# Altium PCB controller.PcbDoc
Units mil, origin at the board's own origin, x right, y up, seen from the top; angles counter-clockwise.
Board outline 2362.2 x 2362.2 mil, 2 copper layers (Top Layer, Bottom Layer), stack 61.756 mil thick; 2 components, 4 nets, 21 pads, 0 vias.
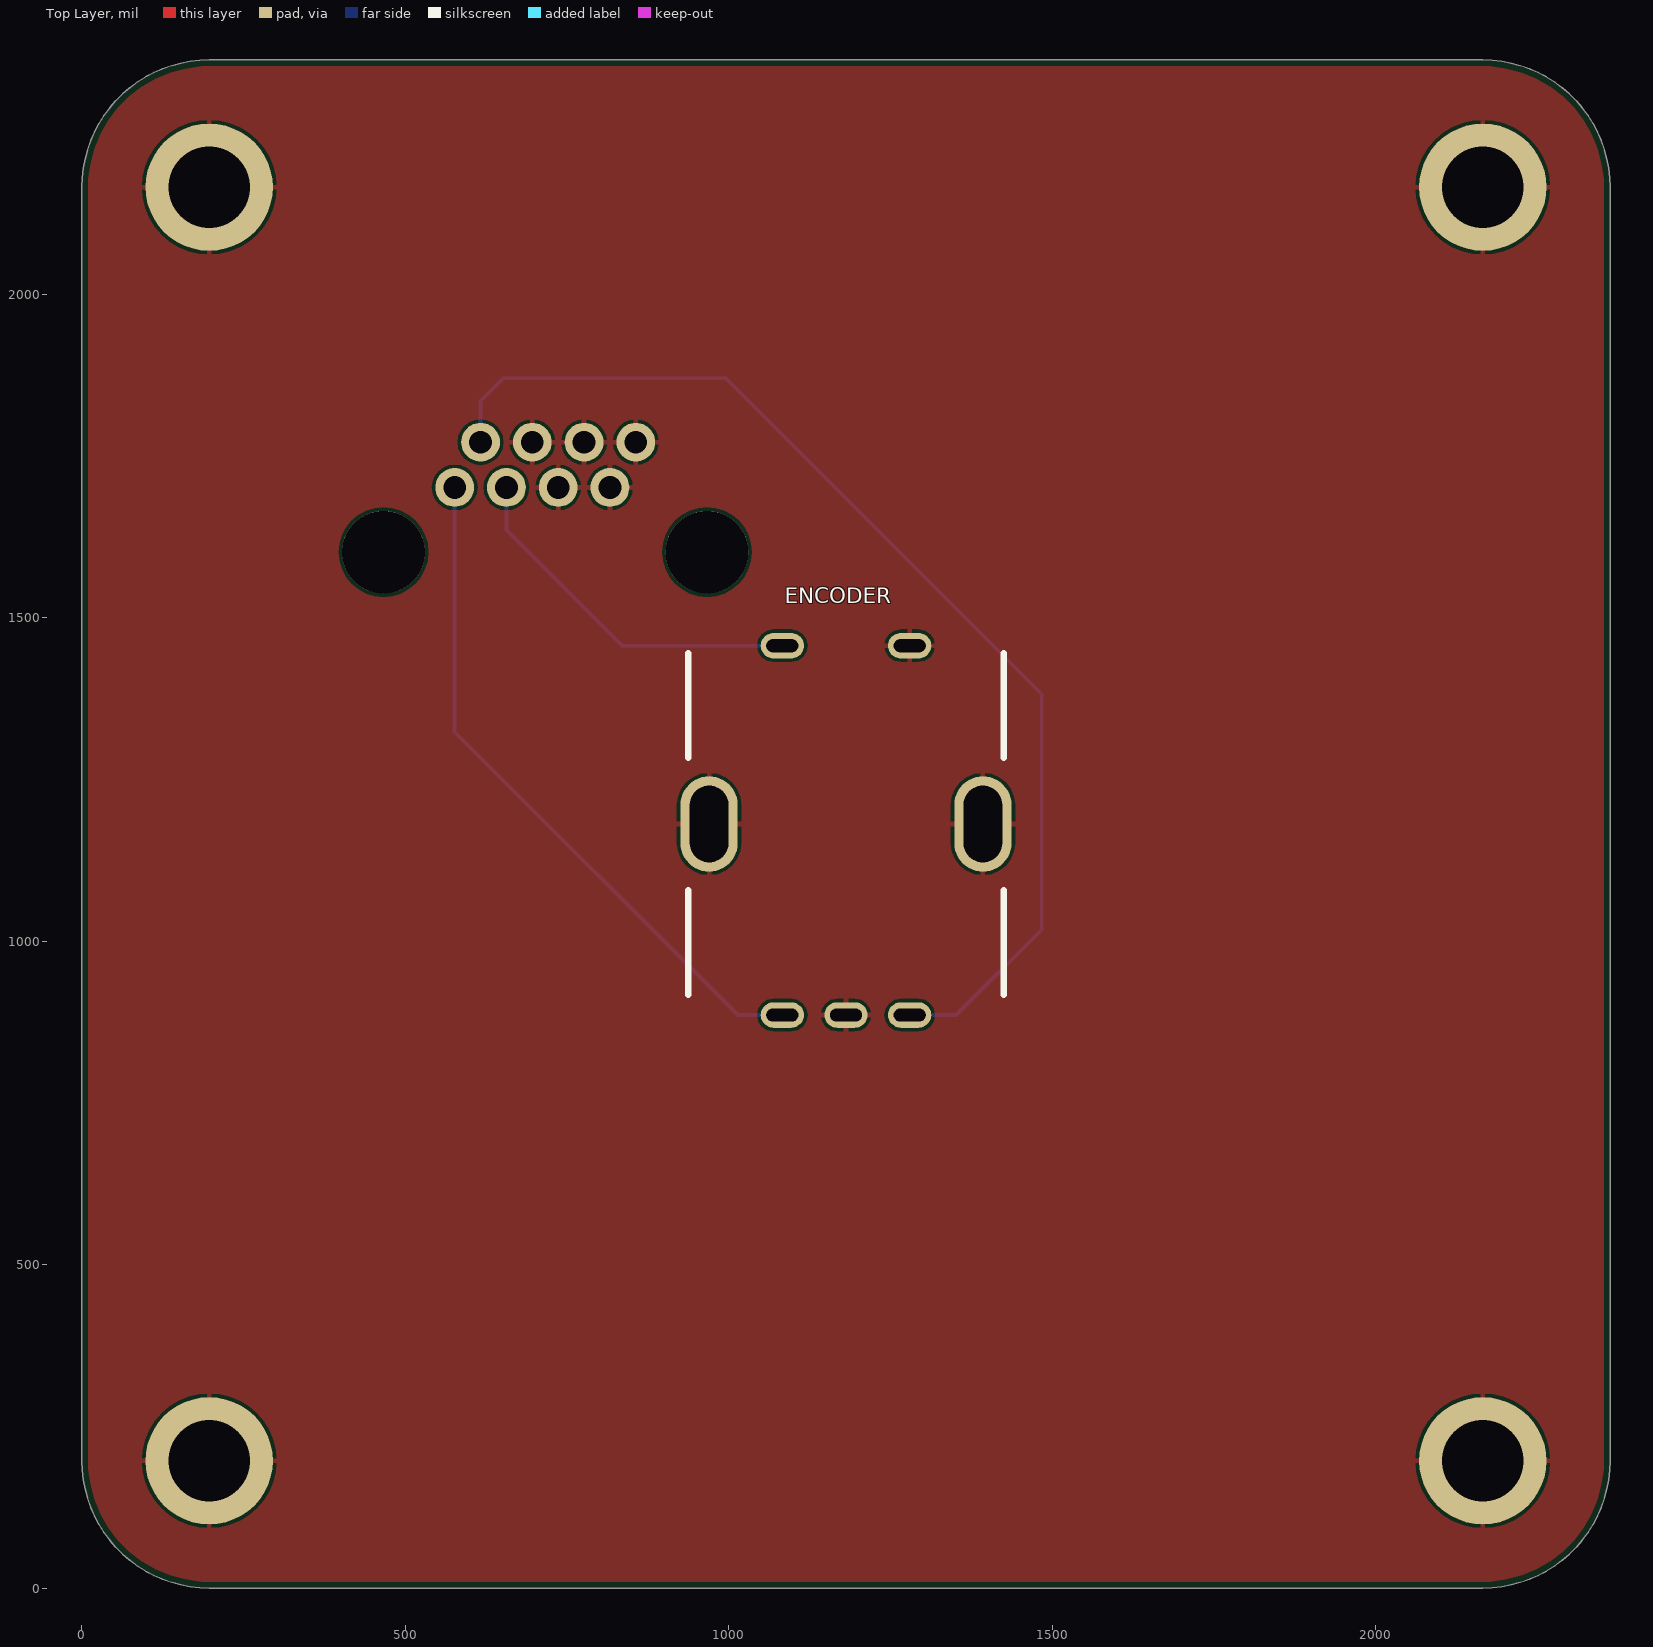
[diagram p0: Top Layer view]
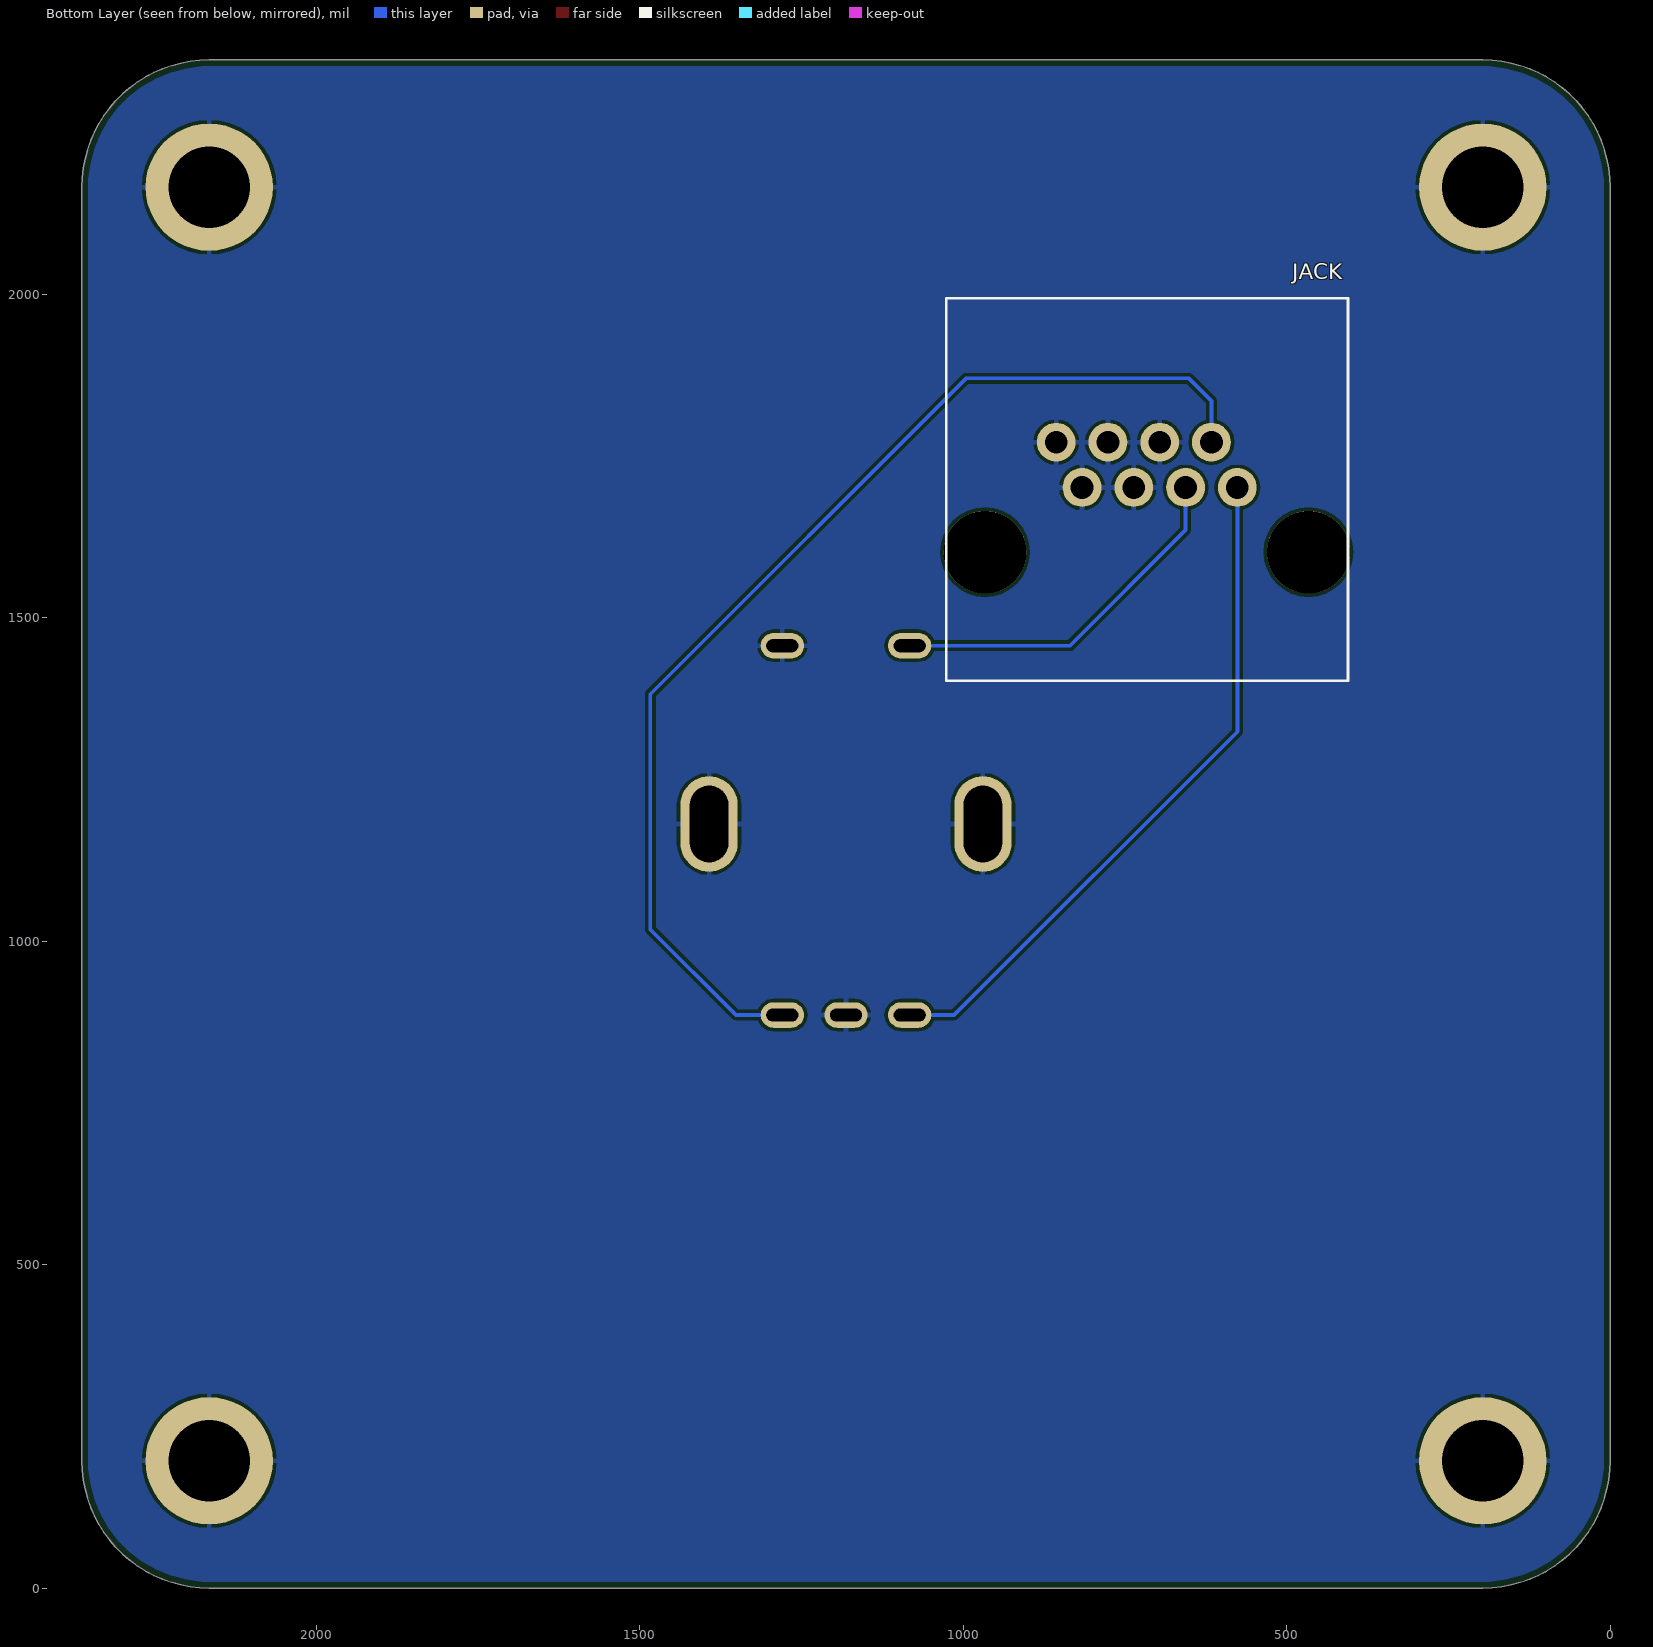
[diagram p1: Bottom Layer view, seen from below]

## Layer stack, top to bottom
Top Solder: solder mask 1, SM-001, Dk 4
Top Layer: signal copper 1.378
Dielectric 1: core 59, Core-043, Dk 4.3
Bottom Layer: signal copper 1.378
Bottom Solder: solder mask 1, SM-001, Dk 4

## Board outline
0,196.85 0,2165.35 cw(c196.85,2165.35) 196.85,2362.2 2165.35,2362.2 cw(c2165.35,2165.35) 2362.2,2165.35 2362.2,196.85 cw(c2165.35,196.85) 2165.35,0 196.85,0 cw(c196.85,196.85)

## Design rules (kind name [scope] priority, off if disabled: settings)
BoardOutlineClearance [All] p1: gap=10 ignorepadtopadclearanceinfootprint=FALSE except(0: Arc-SplitContinuation Track-SplitContinuation SMDPad-SplitContinuation THPad-SplitContinuation Via-SplitContinuation Fill-SplitContinuation Poly-SplitContinuation Region-SplitContinuation Text-SplitContinuation)
Clearance [All] p1: gap=5 ignorepadtopadclearanceinfootprint=FALSE
HoleSize [All] p1: absolutevalues=TRUE maxlimit=157.48 minlimit=0.98 maxpercent=80.000 minpercent=20.000
PolygonConnect [All] p1: connectstyle=Relief reliefconductorwidth=8 reliefentries=4 polygonreliefangle="90 Angle" airgapwidth=5
RoutingVias [All] p1: holewidth=28 width=50 viastyle="Through Hole" minholewidth=28 minwidth=50 maxholewidth=28 maxwidth=50
SolderMaskExpansion [All] p1: expansion=4 istentingtop=FALSE
Width [All] p1: maxlimit=10 minlimit=6 preferedwidth=10 minimp=50.000000 maximp=50.000000 favimp=50.000000
29 further rules are at their usual default settings.

## Components (designator, comment, footprint, x,y, rotation, side; value= is the part's Value field where it differs from the comment)
ENCODER "ROTARY_ENCODER" ENCODER 1181.1,1181.1 r0 top
JACK "RJ45JACK" RJHSE-5080 966.25,1601.28 r180 bottom

## Footprints (in the part's own frame and the unit in brackets; to place one, negate y for a bottom-side part, rotate by r counter-clockwise, add the part's x,y. Pads: shape width x height; smd on the part's side, far side on the other; paste and mask are expansions set on the pad)
ENCODER [mm] "Rotary encoder"
  oval 1.7x1 hole 0.5 slot 1.25 at 0 deg: 1(-2.5,-7.5) 2(0,-7.5) 3(2.5,-7.5) 4(-2.5,7) 5(2.5,7)
  rrect100% 2.25x3.75 hole 1.5 slot 3 at 90 deg: 2(-5.375,0)
  oval 2.25x3.75 hole 1.5 slot 3 at 90 deg: 2(5.375,0)
  silkscreen extent -6.2,-6.7 6.2,6.7, body extent -6.16,-7.75 6.14,7.25, height 21.4
RJHSE-5080 [mil] "RJ45 Jack"
  round 60 hole 35: 1(390,100) 2(350,170) 3(310,100) 4(270,170) 5(230,100) 6(190,170) 7(150,100) 8(110,170)
  round 128 hole 128 unplated: M1(0,0) M2(500,0)
  silkscreen extent -60,-199 561,393, body extent -59,-198 561,392, height 506

## Part data
ENCODER: "Rotary Encoder"

## Free pads (board coordinates)
  round 196.85 hole 125.98: 1(196.85,196.85) 1(196.85,2165.35) 1(2165.35,196.85) 1(2165.35,2165.35)

## Nets (pads, with @x,y where several pads share a name; then routed paths per layer and width w, separated by ;. In a path a pad name is that pad's centre, name@x,y a point inside that pad or via, vN(x,y) a via of type N, cw(c..) or ccw(c..) an arc to the next point about the centre after c; other vN are vias at no path point)
GND: ENCODER.2 ENCODER.5 JACK.4 JACK.5 JACK.6 JACK.7 JACK.8 pad.1
NetENCODER_1: ENCODER.1 JACK.1 | length 1065.4
  Bottom Layer w6: JACK.1 576.25,1323.75 1014.17,885.83 ENCODER.1
NetENCODER_3: ENCODER.3 JACK.2 | length 1770.4
  Bottom Layer w6: JACK.2 616.25,1835.2 651.05,1870 995.33,1870 1483.62,1381.72 1483.62,1018.26 1351.18,885.83 ENCODER.3
NetENCODER_4: ENCODER.4 JACK.3 | length 566.4
  Bottom Layer w6: JACK.3 656.25,1635.3 834.86,1456.69 ENCODER.4
pads on no net: JACK.M1 JACK.M2

## Polygon pours and split planes (outlines as drawn)
GND on Top Layer "GND_L01_P000" (solid, remove dead copper, pour order 0): 0,2362.2 0,0 2362.2,0 2362.2,2362.2
GND on Bottom Layer "GND_L02_P001" (solid, remove dead copper, pour order 1): 0,2362.2 0,0 2362.2,0 2362.2,2362.2

## Silkscreen, mask and mechanical layers (free items; w line width, h text height)
Board:
  the board outline again, w4